# Altium PCB remote.PcbDoc (part 1 of 2)
Units mil, origin at the board's own origin, x right, y up, seen from the top; angles counter-clockwise.
Board outline 4260 x 2525 mil, 2 copper layers (Top Layer, Bottom Layer); 74 components, 68 nets, 281 pads, 69 vias.
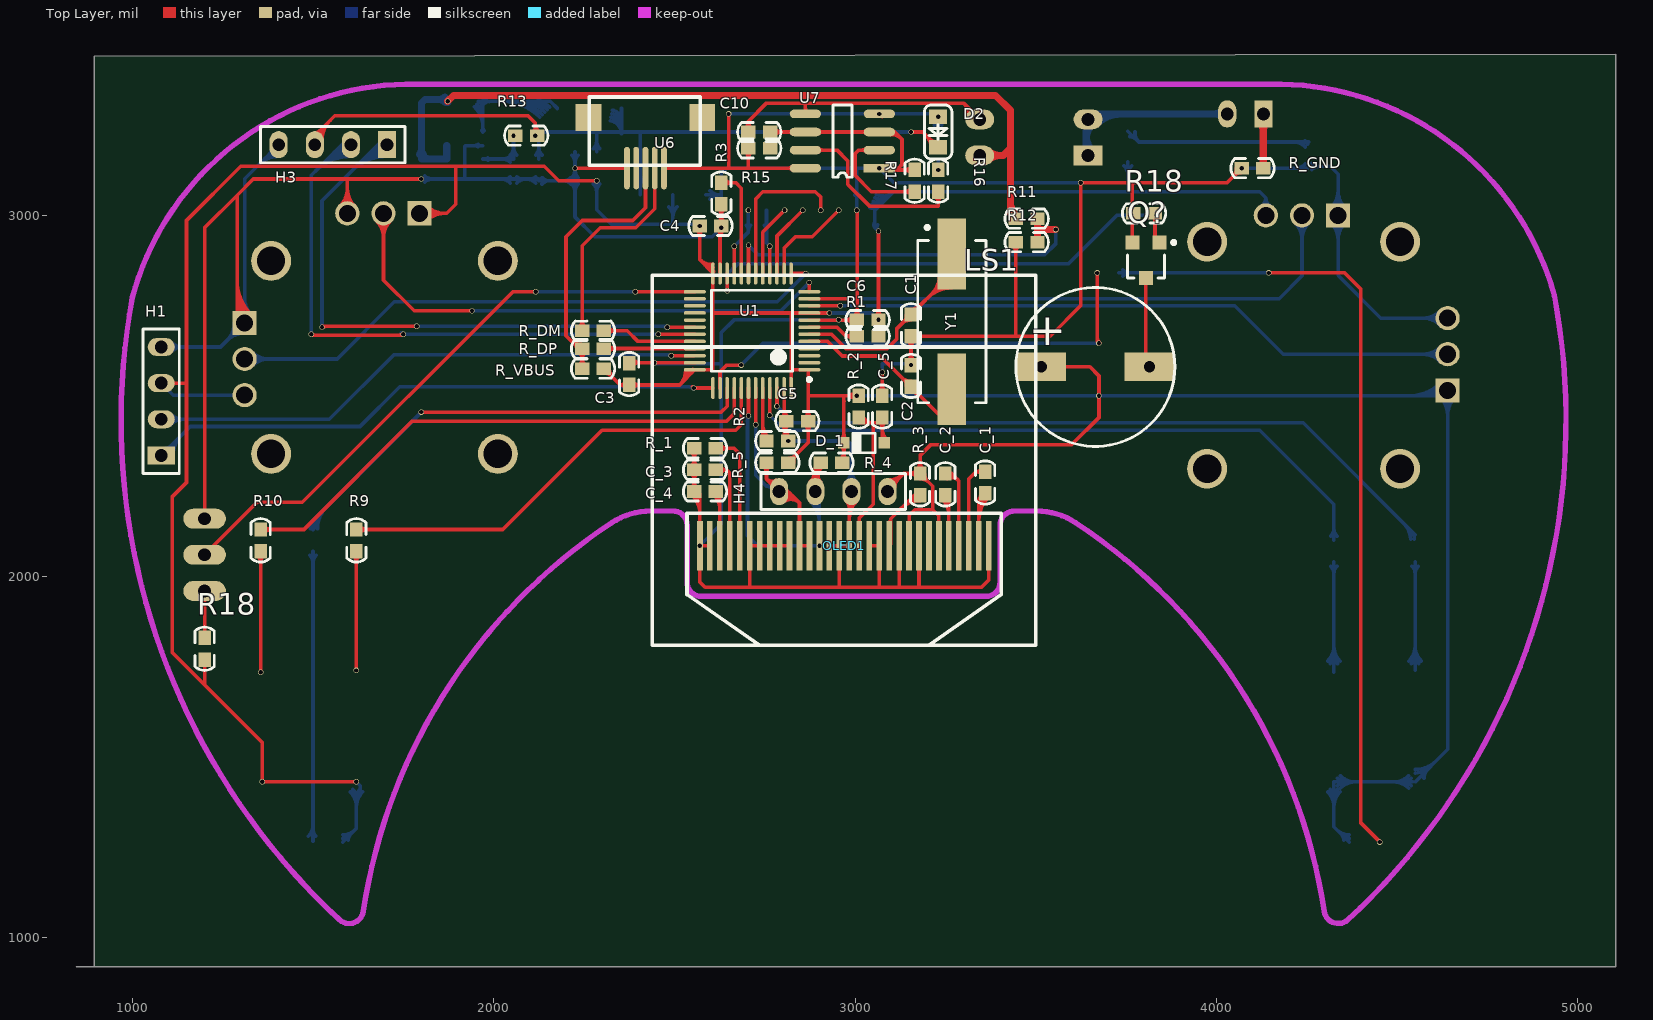
[diagram p0: Top Layer view]
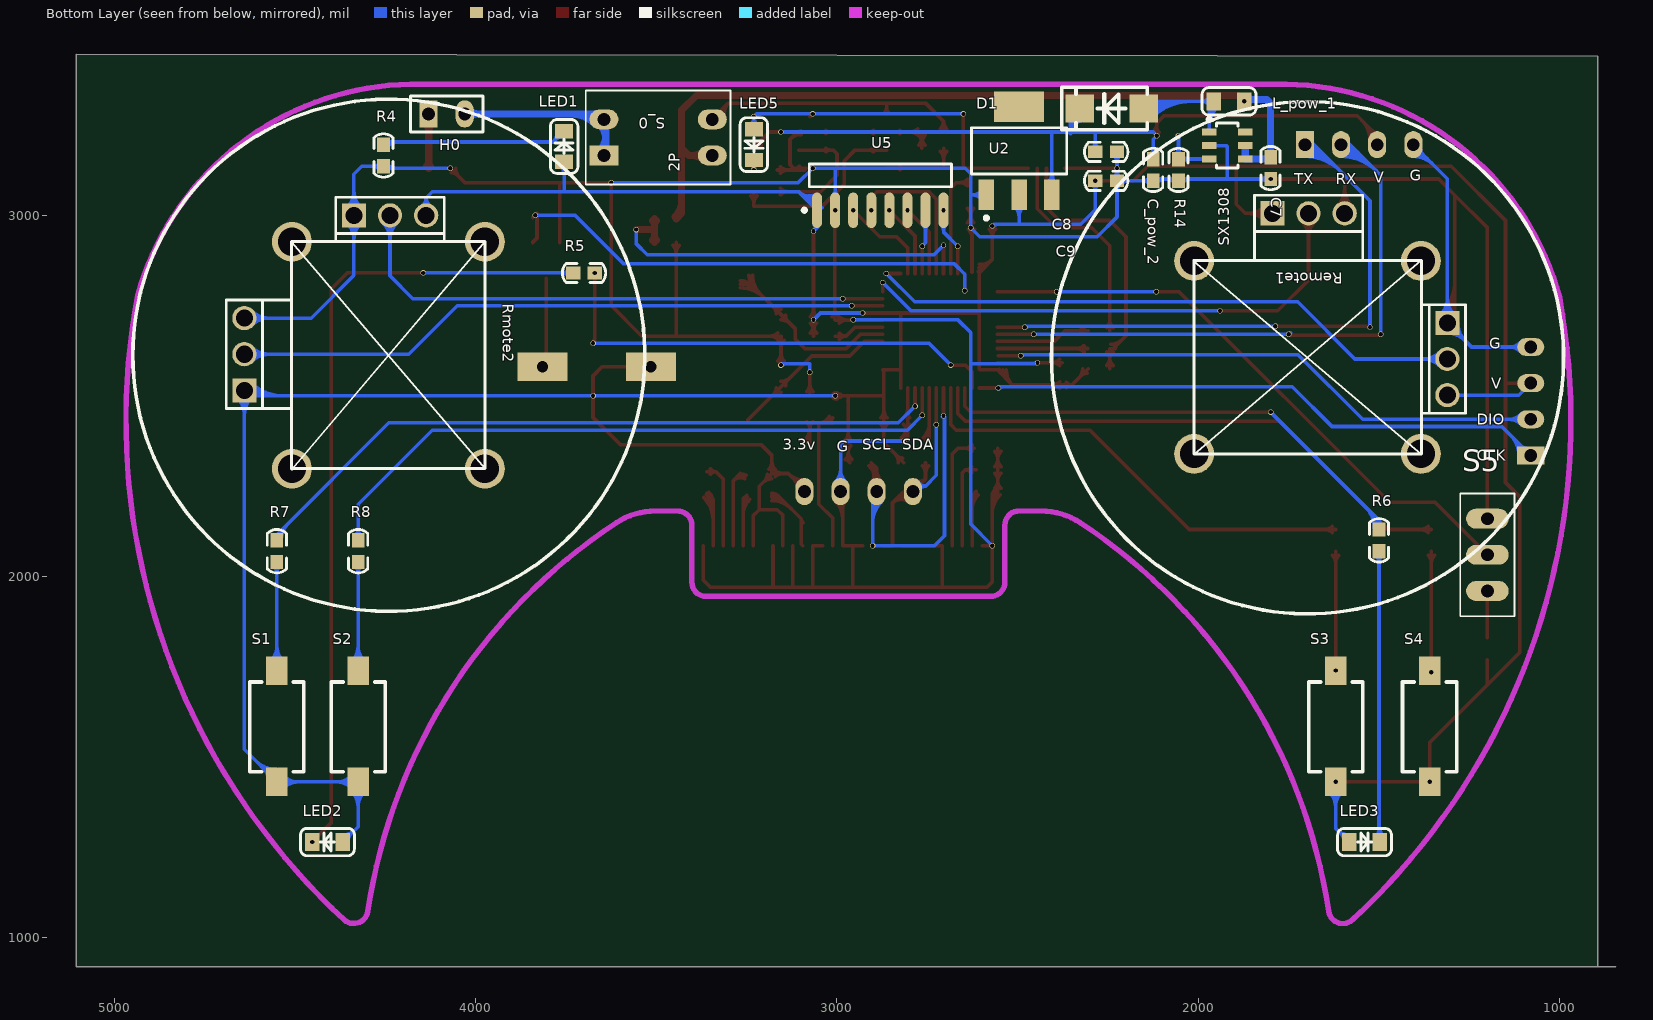
[diagram p1: Bottom Layer view, seen from below]
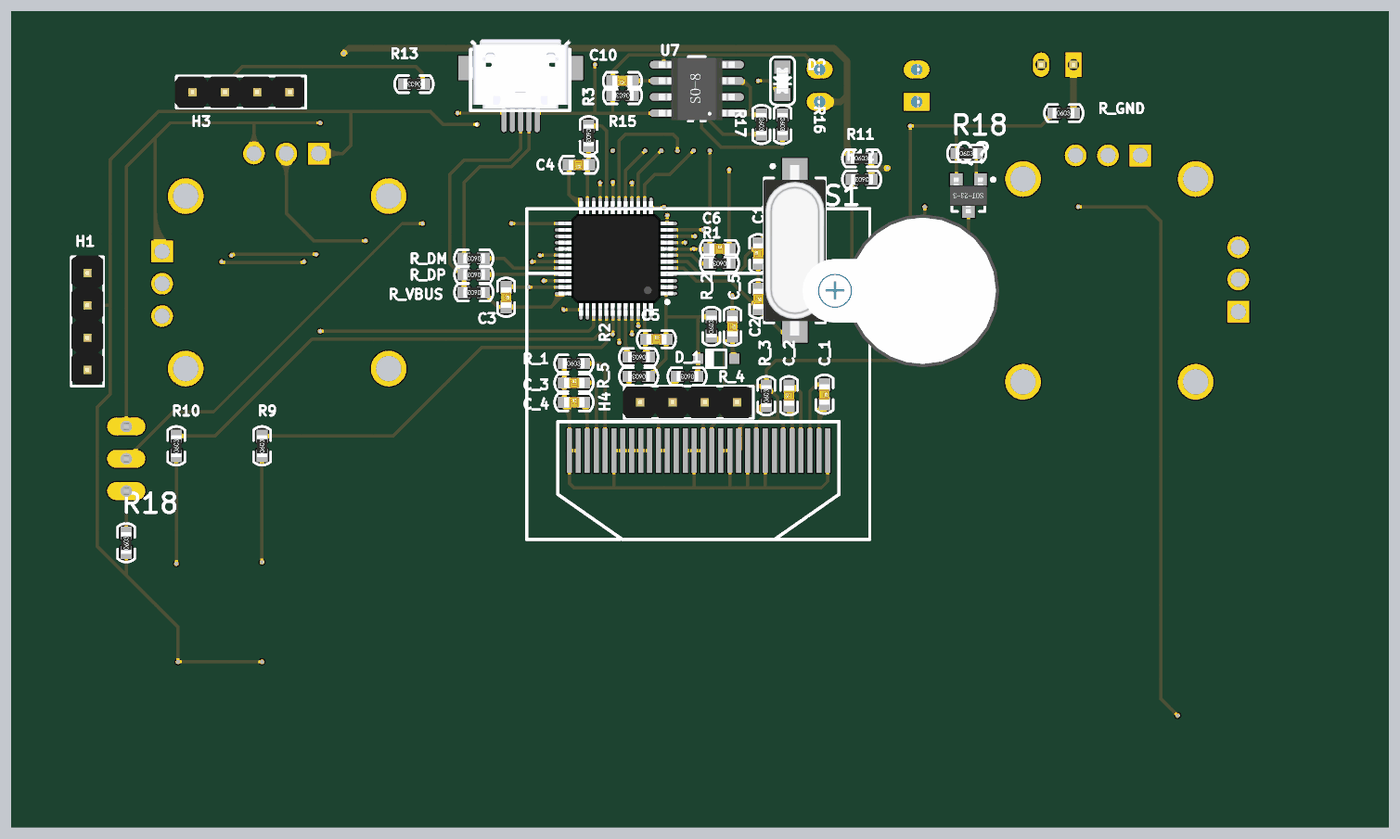
[diagram p3: 3D render of the assembled board from above, using the file's embedded part models]
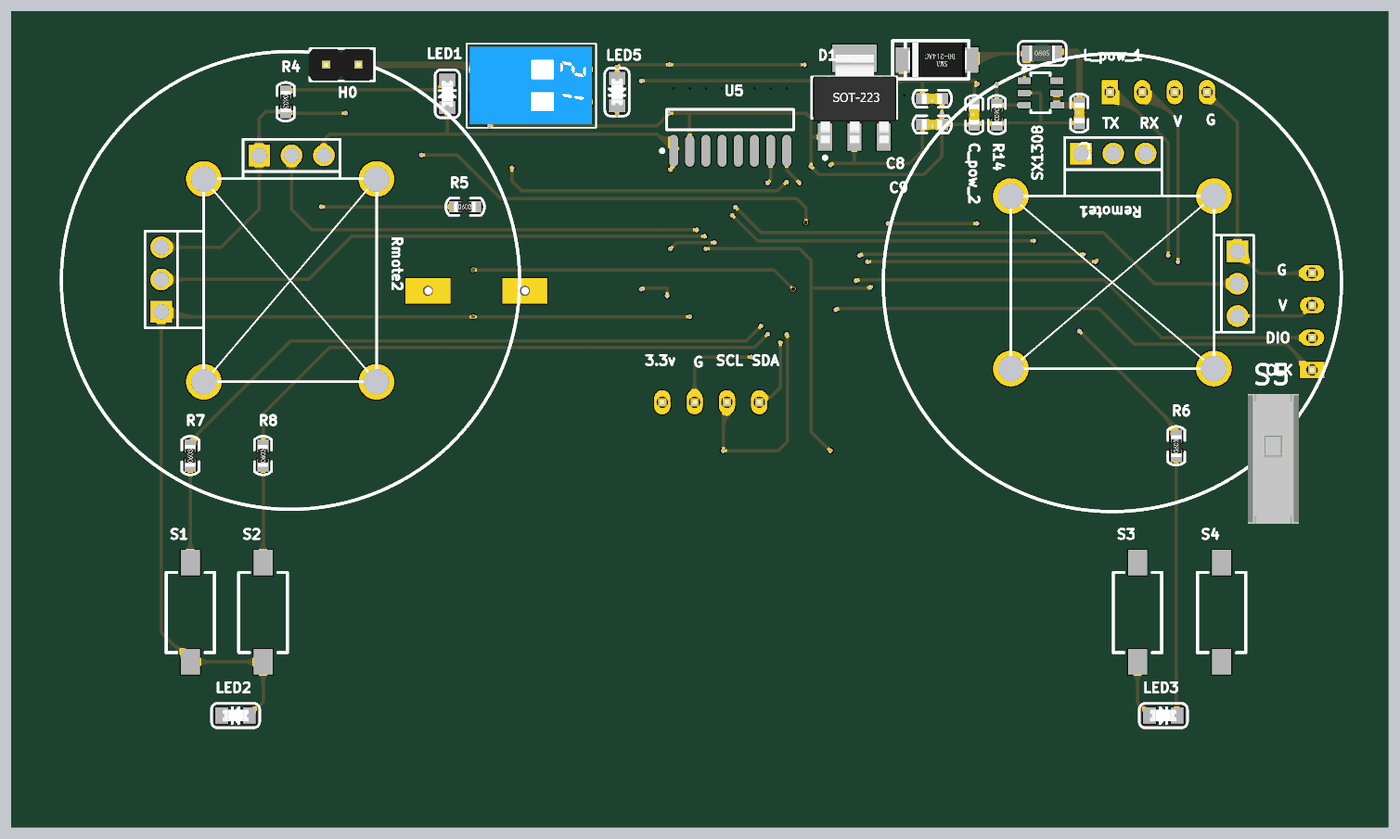
[diagram p4: 3D render of the assembled board from below, using the file's embedded part models]

## Layer stack, top to bottom
Top Layer: signal copper 1.4
Dielectric: dielectric 12.6, FR-4, Dk 4.8
Bottom Layer: signal copper 1.4

## Board outline
5105,3445 5105,920 845,920 895,920 895,3440

## Design rules (kind name [scope] priority, off if disabled: settings)
Clearance [All] p1: gap=6
MinimumSolderMaskSliver [All] p1: minsoldermaskwidth=0
PolygonConnect [All] p1: connectstyle=Relief reliefconductorwidth=10 reliefentries=4 polygonreliefangle="90 Angle"
RoutingVias [All] p1: holewidth=28 width=50 viastyle="Through Hole" minholewidth=28 minwidth=50 maxholewidth=28 maxwidth=50
SilkToSilkClearance [All] p1: silktosilkclearance=0
SilkscreenOverComponentPads [All] p1: minsilkscreentomaskgap=0
SolderMaskExpansion [All] p1: expansion=4
Width [All] p1: maxlimit=30 minlimit=7 preferedwidth=10
25 further rules are at their usual default settings.

## Components (designator, comment, footprint, x,y, rotation, side; value= is the part's Value field where it differs from the comment)
C1 "22" 0603C 3155,2695 r90 top
C2 "104" 0603C 3155,2555 r270 top
C3 "104" 0603C 2375,2560 r270 top
C4 "104" 0603C 2600,2970 r180 top
C5 "104" 0603C 2840,2430 r0 top
C6 "104" 0603C 3035,2710 r0 top
C7 "104" 0603C 1800,3130 r90 bottom
C8 "104" 0603C 2255,3175 r0 bottom
C9 "104" 0603C 2255,3095 r0 bottom
C10 "104" 0603C 2735,3230 r180 top
C_1 "1uf" 0603C 3360,2260 r270 top
C_2 "1uf" 0603C 3250,2255 r90 top
C_3 "4.7uf" 0603C 2585,2295 r0 top
C_4 "2.2uf" 0603C 2585,2235 r0 top
C_5 "2.2uf" 0603C 3075,2470 r270 top
C_pow_2 "22u" 0603C 2125,3125 r90 bottom
D1 "1N5822" DO214AC_SMA 2240,3295 r0 bottom
D2 "" LED-0805 3230,3230 r270 top
D_1 "4148" SOD-323 3025,2370 r0 top
H0 "Header 2" HDR1X2 4080,3280 r180 bottom
H1 "DEBUG" HDR1X4#1 1080,2485 r90 top
H3 "光流" HDR1X4#1 1555,3195 r180 top
H4 "oled" HDR1X4#2 2940,2235 r180 top
L_pow_1 "4.7uH" 0805L 1915,3315 r180 bottom
LED1 "LED0805" LED-0805 3755,3190 r90 bottom
LED2 "LED0805" LED-0805 4410,1265 r0 bottom
LED3 "LED0805" LED-0805 1540,1265 r180 bottom
LED5 "LED0805" LED-0805 3230,3195 r270 bottom
LS1 "有源蜂鸣器" 蜂鸣器-有源 3665,2580 r0 top
OLED1 "OLED12864" OLED_0.96 3370,2085 r180 top
Q? "NPN" SOT23 3805,2875 r180 top
R1 "10K" 0603R 3035,2665 r180 top
R2 "10K" 0603R 2785,2375 r180 top
R3 "10K" 0603R 2630,3060 r270 top
R4 "1K" 0603R 4255,3165 r270 bottom
R5 "1K" 0603R 3700,2840 r180 bottom
R6 "1K" 0603R 1500,2100 r90 bottom
R7 "1K" 0603R 4550,2070 r90 bottom
R8 "1K" 0603R 4325,2070 r90 bottom
R9 "1K" 0603R 1620,2100 r90 top
R10 "1K" 0603R 1355,2100 r90 top
R11 "1K" 0603R 3475,2990 r0 top
R12 "1K" 0603R 3475,2925 r180 top
R13 "70k" 0603R 2090,3220 r180 top
R14 "10K" 0603R 2055,3125 r270 bottom
R15 "10k" 0603R 2735,3185 r180 top
R16 "1K" 0603R 3230,3095 r270 top
R17 "2k" 0603R 3165,3095 r270 top
R18 "2k" 0603R 3800,3005 r0 top
R18 "1k" 0603R 1200,1800 r90 top
R_1 "760K" 0603R 2585,2355 r0 top
R_2 "760K" 0603R 3010,2470 r90 top
R_3 "4.7k" 0603R 3180,2255 r90 top
R_4 "4.7k" 0603R 2935,2315 r180 top
R_5 "4.7k" 0603R 2785,2315 r180 top
R_DM "10" 0603R 2275,2680 r180 top
R_DP "10" 0603R 2275,2630 r180 top
R_GND "0K" 0603R 4100,3130 r0 top
R_VBUS "1.5k" 0603R 2275,2575 r180 top
Remote1 "摇杆电位器" 摇杆电位器 1795,3005 r270 bottom locked
Rmote2 "摇杆电位器" 摇杆电位器 4640,2515 r180 bottom locked
S1 "SW3*6" SW-3*6 4550,1585 r90 bottom
S2 "SW3*6" SW-3*6 4325,1585 r90 bottom
S3 "SW3*6" SW-3*6 1620,1585 r90 bottom
S4 "SW3*6" SW-3*6 1360,1585 r90 bottom
S5 "2档平拨开关 无支撑" 平拨2档开关100mil 1200,2060.01 r270 bottom
S_0 "SW-DIP2" 拨码开关2P 3495,3215 r90 bottom
SX1308 "TP4059" SOT23-6S 1970,3230 r180 bottom
U1 "STM32F103C8T6" LQFP48_L 2715,2680 r180 top
U2 "AMS1117adj" SOT223 2490,3170 r180 bottom
U5 "NRF24l01" NSO16_M 2880,3110 r90 bottom
U6 "USB_MICRO" "USB micro" 2420,3200 r270 top
U7 "TP4056" SOP8 2965,3205 r180 top
Y1 "扁晶振" Y-A-SMD 3290,2735 r270 top

## Footprints (in the part's own frame and the unit in brackets; to place one, negate y for a bottom-side part, rotate by r counter-clockwise, add the part's x,y. Pads: shape width x height; smd on the part's side, far side on the other; paste and mask are expansions set on the pad)
0603C [mil]
  rect 40x35 smd: 1(-30,0) 2(30,0)
  silkscreen extent -60,-27 60,27, body extent -31,-16 32,16, height 12
0603R [mil]
  rect 40x35 smd: 1(-30,0) 2(30,0)
  silkscreen extent -60,-27 60,27, body extent -34,-16 32,15, height 22
0805L [mil]
  rect 40x50 smd: 1(-42.5,0) 2(42.5,0)
  silkscreen extent -75,-38 75,38, body extent -39,-25 39,25, height 22
DO214AC_SMA [mm]
  rect 2x2 smd: 1(-2.25,0) 2(2.25,0)
  silkscreen extent -2.5,-1.5 3.5,1.5, body extent -2.33,-1.35 2.27,1.35, height 2.4
HDR1X2 [mm]
  rect 1.27x1.905 hole 0.9: 1(-1.27,0)
  oval 1.27x1.905 hole 0.9: 2(1.27,0)
  silkscreen extent -2.54,-1.27 2.54,1.27, body extent -2.64,-1.25 2.44,1.25, height 8.2
HDR1X4#1 [mm]
  rect 1.27x1.905 hole 0.9: 1(-3.81,0)
  oval 1.27x1.905 hole 0.9: 2(-1.27,0) 3(1.27,0) 4(3.81,0)
  silkscreen extent -5.08,-1.27 5.08,1.27, body extent -4.98,-1.25 5.18,1.25, height 8.2
HDR1X4#2 [mm]
  oval 1.27x1.905 hole 0.9: 1(-3.81,0) 2(-1.27,0) 3(1.27,0) 4(3.81,0)
  silkscreen extent -5.08,-1.27 5.08,1.27, body extent -4.98,-1.25 5.18,1.25, height 8.2
LED-0805 [mil]
  rect 40x50 smd: 1(-42.5,0) 2(42.5,0)
  silkscreen extent -75,-38 75,38, body extent -41,-18 40,18, height 33
LQFP48_L [mm] "Thin QFP, 48-Leads, Body 7x7mm, Pitch 0.5mm, IPC High Density"
  oval 1.55x0.25 smd: 1(-4.025,2.75) 2(-4.025,2.25) 3(-4.025,1.75) 4(-4.025,1.25) 5(-4.025,0.75) 6(-4.025,0.25) 7(-4.025,-0.25) 8(-4.025,-0.75) 9(-4.025,-1.25) 10(-4.025,-1.75) 11(-4.025,-2.25) 12(-4.025,-2.75) 25(4.025,-2.75) 26(4.025,-2.25) 27(4.025,-1.75) 28(4.025,-1.25) 29(4.025,-0.75) 30(4.025,-0.25) 31(4.025,0.25) 32(4.025,0.75) 33(4.025,1.25) 34(4.025,1.75) 35(4.025,2.25) 36(4.025,2.75)
  oval 0.25x1.55 smd: 13(-2.75,-4.025) 14(-2.25,-4.025) 15(-1.75,-4.025) 16(-1.25,-4.025) 17(-0.75,-4.025) 18(-0.25,-4.025) 19(0.25,-4.025) 20(0.75,-4.025) 21(1.25,-4.025) 22(1.75,-4.025) 23(2.25,-4.025) 24(2.75,-4.025) 37(2.75,4.025) 38(2.25,4.025) 39(1.75,4.025) 40(1.25,4.025) 41(0.75,4.025) 42(0.25,4.025) 43(-0.25,4.025) 44(-0.75,4.025) 45(-1.25,4.025) 46(-1.75,4.025) 47(-2.25,4.025) 48(-2.75,4.025)
  silkscreen extent -4.15,-2.85 2.85,3.55, body extent -4.5,-4.5 4.5,4.5, height 1.5
NSO16_M [mm] "SOIC, 16-Leads, Body 9.9x3.9mm"
  oval 2.5x0.7 smd: 1(-2.45,4.445) 2(-2.45,3.175) 3(-2.45,1.905) 4(-2.45,0.635) 5(-2.45,-0.635) 6(-2.45,-1.905) 7(-2.45,-3.175) 8(-2.45,-4.445)
  round 0 smd: 9(2.45,-4.445) 10(2.45,-3.175) 11(2.45,-1.905) 12(2.45,-0.635) 13(2.45,0.635) 14(2.45,1.905) 15(2.45,3.175) 16(2.45,4.445)
  silkscreen extent -2.57,-5 0.8,5.47, body extent -2,-5 2,5, height 1.75
OLED_0.96 [mm]
  rect 0.4x3.5 smd: 1(0,0) 2(0.7,0) 3(1.4,0) 4(2.1,0) 5(2.8,0) 6(3.5,0) 7(4.2,0) 8(4.9,0) 9(5.6,0) 10(6.3,0) 11(7,0) 12(7.7,0) 13(8.4,0) 14(9.1,0) 15(9.8,0) 16(10.5,0) 17(11.2,0) 18(11.9,0) 19(12.6,0) 20(13.3,0) 21(14,0) 22(14.7,0) 23(15.4,0) 24(16.1,0) 25(16.8,0) 26(17.5,0) 27(18.2,0) 28(18.9,0) 29(19.6,0) 30(20.3,0)
  silkscreen extent -3.3,-19.01 23.66,6.99
SOD-323 [mm]
  rect 0.8x0.8 smd: 1(1.422,0) 2(-1.422,0)
  silkscreen extent -0.79,-0.74 0.79,0.69
SOP8 [mm]
  rect 2.2x0.6 smd: 1(-2.6,1.905)
  oval 2.2x0.6 smd: 2(-2.6,0.635) 3(-2.6,-0.635) 4(-2.6,-1.905) 5(2.6,-1.905) 6(2.6,-0.635) 7(2.6,0.635) 8(2.6,1.905)
  silkscreen extent -0.66,-2.54 0.66,2.54, body extent -3,-2.45 3,2.45
SOT23 [mm]
  rect 1x1 smd: 1(-0.95,-1.25) 2(0.95,-1.25) 3(0,1.25)
  silkscreen extent -2.08,-1.37 1.3,1.25, body extent -1.45,-1.4 1.45,1.4, height 1.2
SOT23-6S [mil]
  rect 39.37x20 smd: 1(0,0) 2(0,-37.5) 3(0,-74.8) 4(100,-74.8) 5(100,-37.5) 6(100,0)
  silkscreen extent 0,-99 80,35
SOT223 [mm]
  rect 1.1x2.15 smd: 1(-2.452,-2.897) 2(-0.152,-2.897) 3(2.148,-2.897)
  rect 3.5x2.15 smd: 4(-0.152,3.303)
  silkscreen extent -3.5,-4.65 3.2,1.83, body extent -3.38,-3.38 3.12,3.58, height 1.68
SW-3*6 [mm]
  rect 2x1.5 smd: 1(-3.9,0) 2(3.9,0)
  silkscreen extent -3.17,-1.9 3.13,1.9, body extent -3.96,-1.95 3.93,1.9, height 2.5
"USB micro" [mm]
  round 0 all layers, no hole: 0(0.375,2) 0(0.375,-2)
  oval 3x0.4 smd: 1(1.775,1.3) 2(1.775,0.65) 3(1.775,0) 4(1.775,-0.65) 5(1.775,-1.3)
  rect 1.9x1.8 smd: 6(-1.775,4) 7(-1.775,-4)
  silkscreen extent -3.22,-3.94 1.58,3.86, body extent -4.01,-4 1.42,3.98, height 2.67
Y-A-SMD [mm]
  rect 5x2 smd: 1(-3.988,-0.559) 2(5.512,-0.559)
  silkscreen extent -5.99,-2.96 6.46,1.84, body extent -5.94,-3.02 7.46,1.88, height 4
平拨2档开关100mil [mm]
  oval 1.397x3 hole 0.9: 1(-2.54,0) 2(0,0) 3(2.54,0)
  silkscreen extent -4.32,-1.91 4.32,1.91, body extent -5.1,-2 5.1,2, height 6.88
拨码开关2P [mil]
  rect 55x80 hole 35.43: 1(-50,150)
  oval 55x80 hole 35.43: 2(50,150) 3(50,-150) 4(-50,-150)
  silkscreen extent -130,-200 130,200, body extent -120,-188 120,190, height 248
摇杆电位器 [mm]
  rect 1.7x1.7 hole 1.2: 1(0,0) 4(7.7,12.3)
  round 1.7 hole 1.2: 2(0,2.54) 3(0,5.08) 5(10.24,12.3) 6(12.78,12.3)
  round 2.8 hole 2: 7(3.348,10.445) 8(16.912,10.445) 9(16.912,-5.507) 10(3.348,-5.507)
  silkscreen extent -7.84,-15.53 28.15,20.47
蜂鸣器-有源 [mm]
  rect 3.508x2 hole 0.8: 1(-3.81,0) 2(3.81,0)
  silkscreen extent -5.59,-5.58 5.59,5.58, body extent -9.47,-6 5.97,6, height 9.75

## Part data
C1 C2 C3 C4 C5 C6 C7 C8 C9 C10 C_1 C_2 C_3 C_4 C_5 C_pow_2: library part Cap_0603
D1: library part 1N5820-5822SMD, "ÌùÆ"
D2 LED1 LED2 LED3 LED5: library part LE
D_1: library part BAT54, "单肖特基"
H0: "He"
H1 H3 H4: library part "Header 4", "He"
L_pow_1: library part L_0805
LS1: library part 蜂鸣器-有源
Q?: library part NPN_SOT23
R1 R2 R3 R4 R5 R6 R7 R8 R9 R10 R11 R12 R13 R14 R15 R16 R17 R18 R18 R_1 R_2 R_3 R_4 R_5 R_DM R_DP R_GND R_VBUS: library part Res_0603
S1 S2 S3 S4: library part SW-PB2, "3mm*6mm±"
U2: "Èý¶"
U5: library part ULN2003L, "驱动芯片"
U7: "锂"
Y1: library part XTAL1

## Via types
v1: diameter 15, hole 12, Top Layer to Bottom Layer, 69 vias

## Nets (pads, with @x,y where several pads share a name; then routed paths per layer and width w, separated by ;. In a path a pad name is that pad's centre, name@x,y a point inside that pad or via, vN(x,y) a via of type N, cw(c..) or ccw(c..) an arc to the next point about the centre after c; other vN are vias at no path point)
3.3V: C3.2 C4.2 C5.2 C6.2 C9.2 D_1.2 H1.3 H4.1 LED1.1 LED2.1 LED3.1 LS1.1 OLED1.6 OLED1.9 R1.1 R18.1@1200,1770 R_2.2 R_3.2 R_4.1 R_5.1 R_VBUS.1 Remote1.1 Remote1.6 Rmote2.1 Rmote2.6 S1.1 S2.1 S3.1 S4.1 U1.1 U1.9 U1.24 U1.36 U1.48 U2.2 U5.1 | length 15691.5
  Top Layer w10: H1.3@1080,2535 1145,2535 ; R18.1@1200,1770 1200,1700 ; v1(1620,1431.46) v1(1360,1431.46) 1360,1540 1200,1700 ; Remote1.1@1795,3005 1870,3005 1895,3030 1895,3135 ; Remote1.1@1808.06,2991.94 cw(c1839.58,2960.42) 1839.58,3005 cw(c1839.58,3049.58) Remote1.1@1808.06,3018.06 ; Remote1.1@1815.13,2984.87 cw(c1863.72,2936.28) 1863.72,3005 cw(c1863.72,3073.72) Remote1.1@1815.13,3025.13 ; v1(2285,3095) 2180,3095 2140,3135 1895,3135 ; R_VBUS.1@2305,2575 2350,2530 ; R_VBUS.1@2307.5,2562.5 cw(c2307.5,2538.36) 2324.57,2555.43 ; R_VBUS.1@2320,2575 ccw(c2356.21,2575) 2330.61,2549.39 ; C3.2@2365,2522.5 ccw(c2350,2511.25) 2350,2530 ; C3.2@2365,2537.5 cw(c2350,2548.75) 2350,2530 ; C3.2@2383.84,2521.16 cw(c2405.18,2499.82) 2405.18,2530 cw(c2405.18,2560.18) C3.2@2383.84,2538.84 ; 2530.87,2546.06 ccw(c2506.28,2570.64) U1.36@2541.01,2572.18 ; U1.36@2531.02,2571.74 cw(c2475.52,2569.29) 2514.8,2530 ; 2546.93,2562.12 ccw(c2537.05,2572) U1.36@2551,2572.62 ; C4.2@2561.16,2961.16 cw(c2539.82,2939.82) 2570,2939.82 cw(c2600.18,2939.82) C4.2@2578.84,2961.16 ; v1(2570,2970) 2570,2876.93 ; 2584.77,2862.16 ccw(c2604.78,2882.16) U1.24@2607.81,2854.03 ; 2599.54,2847.39 ccw(c2607.66,2855.5) U1.24@2608.89,2844.09 ; U1.24@2605.51,2841.42 2570,2876.93 ; U1.24@2606.73,2838.46 2606.73,2573.46 2605,2571.73 U1.36@2556.54,2571.73 2514.8,2530 ; U1.24@2606.74,2863.98 cw(c2601.9,2908.83) 2570,2876.93 ; 2607.52,2729.21 U1.9@2873.46,2729.21 v1(2929.21,2729.21) ; R_5.1@2815,2315 2870,2370 C5.2@2870,2430 2870,2500 ; R_5.1@2817.5,2327.5 ccw(c2817.5,2351.64) 2834.57,2334.57 ; U1.48@2823.27,2521.54 U1.48@2823.58,2521.54 ; U1.48@2823.5,2521.54 2823.5,2571.73 ; 2823.5,2727.72 2823.5,2571.73 ; R_5.1@2830,2315 cw(c2866.21,2315) 2840.61,2340.61 ; C5.2@2861.16,2421.16 cw(c2839.82,2399.82) 2870,2399.82 cw(c2900.18,2399.82) C5.2@2878.84,2421.16 ; C5.2@2861.16,2438.84 ccw(c2839.82,2460.18) 2870,2460.18 ccw(c2900.18,2460.18) C5.2@2878.84,2438.84 ; 2870,2563.56 cw(c2881.64,2563.56) U1.1@2873.41,2571.79 ; U1.1@2870,2571.5 2870,2500 ; U1.1@2873.46,2571.73 2823.5,2571.73 ; R_4.1@2958.66,2323.84 ccw(c2933.7,2348.8) 2969,2348.8 ; D_1.2@2961.4,2362.4 cw(c2943.05,2344.05) 2969,2344.05 cw(c2994.95,2344.05) D_1.2@2976.6,2362.4 ; D_1.2@2961.4,2377.6 ccw(c2943.05,2395.95) 2969,2395.95 ccw(c2994.95,2395.95) D_1.2@2976.6,2377.6 ; R_4.1@2965,2315 2969,2319 D_1.2@2969,2355 ; 2969,2341.56 ccw(c2994.06,2341.56) R_4.1@2976.34,2323.84 ; D_1.2@2969,2370 2969,2484 ; 2969,2496 2969,2484 ; 2970,2485 2969,2484 ; 2989.66,2496.56 ccw(c2993.34,2507.06) R_2.2@3002.86,2501.3 ; 2989.67,2503.44 cw(c2993.34,2492.94) R_2.2@3002.86,2498.7 ; R_2.2@3001.16,2491.16 ccw(c2979.82,2469.82) 2979.82,2500 ccw(c2979.82,2530.18) R_2.2@3001.16,2508.84 ; R_2.2@3001.3,2492.48 ccw(c3004.12,2500.53) R_2.2@3011.41,2496.11 ; R_2.2@3001.3,2507.52 cw(c3004.12,2499.47) R_2.2@3011.41,2503.89 ; R_2.2@3010,2500 2870,2500 ; R1.1@3056.16,2673.84 ccw(c3034.82,2695.18) 3065,2695.18 ccw(c3095.18,2695.18) R1.1@3073.84,2673.84 ; C6.2@3056.16,2701.16 cw(c3034.82,2679.82) 3065,2679.82 cw(c3095.18,2679.82) C6.2@3073.84,2701.16 ; C6.2@3056.16,2718.84 ccw(c3034.82,2740.18) 3065,2740.18 ccw(c3095.18,2740.18) C6.2@3073.84,2718.84 ; R1.1@3065,2665 v1(3065,2710) v1(3065,2955) ; H4.1@3090.33,2257.49 ccw(c3091.6,2295.79) 3118.7,2268.7 ; H4.1@3090.66,2267.49 ccw(c3092.65,2327.35) 3135,2285 ; H4.1@3100,2250 3135,2285 ; H4.1@3110,2247.5 cw(c3140.18,2247.5) 3118.84,2268.84 ; OLED1.9@3149.53,2085 3149.53,2169.53 3165,2185 3215,2185 ; R_3.2@3171.16,2276.16 ccw(c3149.82,2254.82) 3149.82,2285 ccw(c3149.82,2315.18) R_3.2@3171.16,2293.84 ; R_3.2@3171.16,2296.34 ccw(c3149.82,2317.68) 3180,2317.68 ccw(c3210.18,2317.68) R_3.2@3188.84,2296.34 ; R_3.2@3180,2270 cw(c3180,2233.79) 3205.61,2259.39 ; R_3.2@3192.5,2282.5 ccw(c3216.64,2282.5) 3199.57,2265.43 ; OLED1.6@3232.2,2085 3232.2,2167.8 3215,2185 ; LS1.1@3515,2580 3650,2580 3675,2555 v1(3675,2500) 3675,2440 3600,2365 3210,2365 3180,2335 R_3.2@3180,2285 ; 1200,1700 1110,1790 1110,2220 1150,2260 1150,2985 1300,3135 1895,3135 ; 2350,2530 C3.2@2375,2530 2514.8,2530 ; 3135,2285 R_3.2@3180,2285 ; R_3.2@3180,2285 3215,2250 3215,2185
  Bottom Layer w10: H1.3@1080,2535 1113.15,2501.85 Remote1.6@1310.75,2501.85 ; LED3.1@1582.5,1265 1620,1302.5 1620,1390 ; LED3.1@1582.5,1275 ccw(c1582.5,1299.14) LED3.1@1599.57,1282.07 ; LED3.1@1582.5,1285 ccw(c1582.5,1333.28) 1616.64,1299.14 ; LED3.1@1597.5,1270 cw(c1621.64,1270) 1604.57,1287.07 ; S3.1@1602.66,1404.27 cw(c1560.79,1362.4) 1620,1362.4 cw(c1679.21,1362.4) S3.1@1637.34,1404.27 ; S3.1@1609.73,1411.34 cw(c1584.93,1386.54) 1620,1386.54 cw(c1655.07,1386.54) S3.1@1630.27,1411.34 ; v1(1620,1431.46) 1630.68,1420.78 1630.68,1400.67 1620.01,1390 ; C9.2@2276.16,3086.16 cw(c2254.82,3064.82) 2285,3064.82 cw(c2315.18,3064.82) C9.2@2293.84,3086.16 ; v1(2285,3095) 2285,3015 2325,2975 v1@2565,2975 ; U2.2@2484.22,3023.51 cw(c2455.8,2995.08) 2496,2995.08 cw(c2536.21,2995.08) U2.2@2507.78,3023.51 ; 2496,2976 U2.2@2496,3055.95 ; 2551.89,2975 cw(c2551.89,2951.89) v1@2568.23,2968.23 ; v1(2929.21,2729.21) 3045.79,2729.21 v1(3065,2710) ; v1(3005,2500) v1(3675,2500) 4625,2500 Rmote2.1@4640,2515 4640,1521.46 S1.1@4550,1431.46 ; U5.1@3041.47,3020.84 ccw(c3051.01,3040.67) U5.1@3066.57,3025.11 ; U5.1@3045.8,3029.85 ccw(c3057.48,3054.14) 3076.54,3035.08 ; U5.1@3050.14,3038.86 ccw(c3063.96,3067.61) 3086.51,3045.06 ; U5.1@3053.95,2978.73 ccw(c3064.32,2972.67) 3055.83,2964.17 ; U5.1@3054.47,3047.88 ccw(c3070.44,3081.08) 3096.48,3055.03 ; U5.1@3058.8,3056.89 ccw(c3076.91,3094.54) 3106.46,3065 ; U5.1@3062.58,2973.69 ccw(c3075.91,2965.91) v1(3065,2955) 3055,2965 U5.1@3055,3013.54 3106.46,3065 ; LED1.1@3744.39,3136.89 cw(c3718.79,3111.29) 3755,3111.29 cw(c3791.21,3111.29) LED1.1@3765.61,3136.89 ; 3755,3070 LED1.1@3755,3147.5 ; Rmote2.6@4122.79,3024 ccw(c4109.09,3048.15) 4136.85,3048.15 ; Rmote2.6@4136.85,2999.25 4136.85,3048.15 ; Rmote2.6@4150.91,3024 cw(c4164.61,3048.15) 4136.85,3048.15 ; S2.1@4307.66,1404.27 cw(c4265.79,1362.4) 4325,1362.4 cw(c4384.21,1362.4) S2.1@4342.34,1404.27 ; S2.1@4314.73,1411.34 cw(c4289.93,1386.54) 4325,1386.54 cw(c4360.07,1386.54) S2.1@4335.27,1411.34 ; 4333.36,1299.14 ccw(c4367.5,1333.28) LED2.1@4367.5,1285 ; S2.1@4335.27,1421.18 cw(c4360.07,1396.38) 4360.07,1431.46 cw(c4360.07,1466.53) S2.1@4335.27,1441.73 ; S2.1@4342.34,1414.11 cw(c4384.21,1372.24) 4384.21,1431.46 cw(c4384.21,1490.67) S2.1@4342.34,1448.8 ; 4345.43,1287.07 cw(c4328.36,1270) LED2.1@4352.5,1270 ; LED2.1@4350.43,1282.07 ccw(c4367.5,1299.14) LED2.1@4367.5,1275 ; LED2.1@4367.5,1265 4325,1307.5 S2.1@4325,1431.46 S1.1@4543.54,1431.46 ; S1.1@4532.66,1414.11 ccw(c4490.79,1372.24) 4490.79,1431.46 ccw(c4490.79,1490.67) S1.1@4532.66,1448.8 ; 4535.07,2500 ccw(c4535.07,2619.93) Rmote2.1@4619.87,2535.13 ; S1.1@4539.73,1421.18 ccw(c4514.93,1396.38) 4514.93,1431.46 ccw(c4514.93,1466.53) S1.1@4539.73,1441.73 ; S1.1@4550,1455.83 ccw(c4550,1514.66) 4591.6,1473.06 ; S1.1@4550,1465.83 ccw(c4550,1548.8) 4608.67,1490.13 ; 4559.21,2500 ccw(c4559.21,2595.79) Rmote2.1@4626.94,2528.06 ; S1.1@4574.53,1441.3 cw(c4609.98,1441.3) 4584.91,1466.37 ; 4583.35,2500 ccw(c4583.35,2571.65) Rmote2.1@4634.01,2520.99 ; Rmote2.1@4626.94,2501.94 cw(c4595.42,2470.42) 4640,2470.42 cw(c4684.58,2470.42) Rmote2.1@4653.06,2501.94 ; Rmote2.1@4641.09,2513.91 cw(c4607.49,2547.51) 4607.49,2500 cw(c4607.49,2482.49) 4619.87,2494.87 cw(c4571.28,2446.28) 4640,2446.28 cw(c4708.72,2446.28) Rmote2.1@4660.13,2494.87 ; 1620,1390 cw(c1628.11,1390) 1626.09,1397.86 ccw(c1628.11,1390) 1620,1390 ; 1620,1390 ccw(c1611.89,1390) 1613.91,1397.86 cw(c1611.89,1390) 1620,1390 ; 3106.46,3065 4120,3065 4136.85,3048.15
AD: R11.2 R12.1 U1.19 | length 1162.9
  Top Layer w10: U1.19@2705.16,2838.46 v1(2705.16,2916.32)
  Top Layer w20: R12.1@3499.7,2930.3 ccw(c3486.89,2943.11) 3505,2943.11 ccw(c3523.11,2943.11) R12.1@3510.3,2930.3 ; R11.2@3499.7,2984.7 cw(c3486.89,2971.89) 3505,2971.89 cw(c3523.11,2971.89) R11.2@3510.3,2984.7 ; R12.1@3505,2925 3505,2960 ; R11.2@3505,2990 3505,2960 ; v1(3555,2960) 3505,2960
  Bottom Layer w10: v1(2705.16,2916.32) 2731.47,2890 3525,2890 3555,2920 v1(3555,2960)
BAT: C7.2 L_pow_1.2 R11.1 S_0.4 SX1308.4 SX1308.5 | length 2545.2
  Top Layer w20: v1(1872.5,3315) 1888.5,3331 3389,3331 3430,3290 3430,3185 ; S_0.4@3345,3165 3410,3165 3430,3185 ; S_0.4@3369.87,3152.63 cw(c3399.75,3122.75) 3399.75,3165 cw(c3399.75,3207.25) S_0.4@3369.87,3177.37 ; 3430,3038.28 ccw(c3490.78,3038.28) R11.1@3447.8,2995.3 ; R11.1@3445,2990 3430,3005 3430,3185
  Bottom Layer w10: SX1308.4@1865.2,3160 SX1308.4@1870,3164.8
  Bottom Layer w20: C7.2@1794.7,3167.8 ccw(c1781.89,3180.61) 1800,3180.61 ccw(c1818.11,3180.61) C7.2@1805.3,3167.8 ; C7.2@1805.3,3162.8 ccw(c1823.67,3181.17) 1823.67,3155.2 ; L_pow_1.2@1863.92,3313.8 ccw(c1870,3324.33) L_pow_1.2@1873.15,3312.59 ; L_pow_1.2@1865.43,3312.93 ccw(c1848.36,3295.86) 1848.36,3320 ccw(c1848.36,3344.14) L_pow_1.2@1865.43,3327.07 ; L_pow_1.2@1866.46,3320 cw(c1866.46,3308.96) L_pow_1.2@1874.27,3316.77 ; SX1308.5@1870,3192.5 1870,3164.8 SX1308.4@1870,3155.2 1800,3155.2 C7.2@1800,3160 1800,3310 1810,3320 L_pow_1.2@1872.5,3320
BAT_IN: H0.2 S_0.1 S_0.2 | length 796.8
  Bottom Layer w10: S_0.2@3640,3260 S_0.2@3660,3280
  Bottom Layer w20: S_0.1@3632.63,3177.37 ccw(c3614.82,3195.18) 3640,3195.18 ; S_0.2@3632.63,3252.63 cw(c3614.82,3234.82) 3640,3234.82 ; S_0.1@3640,3160 S_0.2@3640,3260 ; 3640,3210.68 cw(c3699.32,3210.68) S_0.2@3657.37,3252.63 ; 3640,3219.32 ccw(c3699.32,3219.32) S_0.1@3657.37,3177.37 ; S_0.2@3655.73,3266.77 cw(c3687.68,3234.82) 3687.68,3280 ; S_0.2@3660,3280 H0.2@4030,3280 ; S_0.2@3669.87,3252.63 cw(c3735.96,3186.54) 3735.96,3280 ; H0.2@4019.39,3269.39 ccw(c3993.79,3243.79) 3993.79,3280 ccw(c3993.79,3316.21) H0.2@4019.39,3290.61
BAT_OUT: C10.2 S_0.3 U7.5 | length 905.8
  Top Layer w10: C10.2@2696.2,3238.88 ccw(c2675.25,3260) 2705,3260 ; C10.2@2705,3230 2705,3260 ; C10.2@2713.8,3238.88 cw(c2734.75,3260) 2705,3260 ; U7.5@2857.82,3284.82 ccw(c2846.19,3296.44) 2862.64,3296.44 ccw(c2879.08,3296.44) U7.5@2867.45,3284.82 ; U7.5@2862.64,3280 2862.64,3310 ; S_0.3@3310.72,3270.64 ccw(c3270.95,3280.95) 3300,3310 ; 3312.37,3297.63 cw(c3290.59,3275.86) S_0.3@3320.4,3268.14 ; 3315.43,3294.57 ccw(c3332.5,3311.64) S_0.3@3332.5,3287.5 ; S_0.3@3345,3265 3300,3310 ; 2705,3260 2755,3310 2862.64,3310 ; 2862.64,3310 3300,3310
BEEP: Q?.1 R18.2@3830,3005 U1.22 | length 1452.6
  Top Layer w10: v1(2646.1,2791.1) U1.22@2646.1,2838.46 ; Q?.1@3842.4,2924.21 3830,2936.61 R18.2@3830,3005 R18.2@3842.4,2992.6
  Bottom Layer w10: v1(2646.1,2791.1) 2646.1,2836.1 2675,2865 3590,2865 3725,3000 v1(3835,3000)
BGND: H0.1 R_GND.2 | length 235.3
  Top Layer w20: H0.1@4119.39,3256.89 cw(c4093.79,3231.29) 4130,3231.29 cw(c4166.21,3231.29) H0.1@4140.61,3256.89 ; R_GND.2@4124.7,3135.3 ccw(c4111.89,3148.11) 4130,3148.11 ccw(c4148.11,3148.11) R_GND.2@4135.3,3135.3 ; R_GND.2@4130,3130 H0.1@4130,3280
BOOT0: R2.2 U1.44 | length 218.2
  Top Layer w10: R2.2@2744.53,2374.53 U1.44@2744.53,2521.54 ; 2744.53,2400.28 ccw(c2777.78,2400.28) R2.2@2754.27,2376.77 ; 2744.53,2424.42 ccw(c2801.92,2424.42) R2.2@2761.34,2383.84
BOOT1: R3.1 U1.20 | length 345.3
  Top Layer w10: R3.1@2630,3090 2670,3090 2685.47,3074.53 U1.20@2685.47,2838.46 ; R3.1@2638.84,3081.16 cw(c2660.18,3059.82) 2660.18,3090 cw(c2660.18,3120.18) R3.1@2638.84,3098.84
CE: U1.14 U5.3 | length 265
  Top Layer w10: U1.14@2803.58,2838.46 2803.58,2908.58 2835,2940 2881.46,2940 v1(2955,3013.54)
CSN: U1.18 U5.4 | length 437.6
  Top Layer w10: U1.18@2724.84,2838.46 2724.84,3044.84 2745,3065 2890,3065 2905,3050 v1(2905,3013.54)